# Altium PCB ET2_test Chip.PcbDoc
Units mil, origin at the board's own origin, x right, y up, seen from the top; angles counter-clockwise.
Board outline 4000 x 3600 mil, 4 copper layers (Top Layer, GND, POWER, Bottom Layer), stack 61.6 mil thick; 148 components, 68 nets, 450 pads, 320 vias.
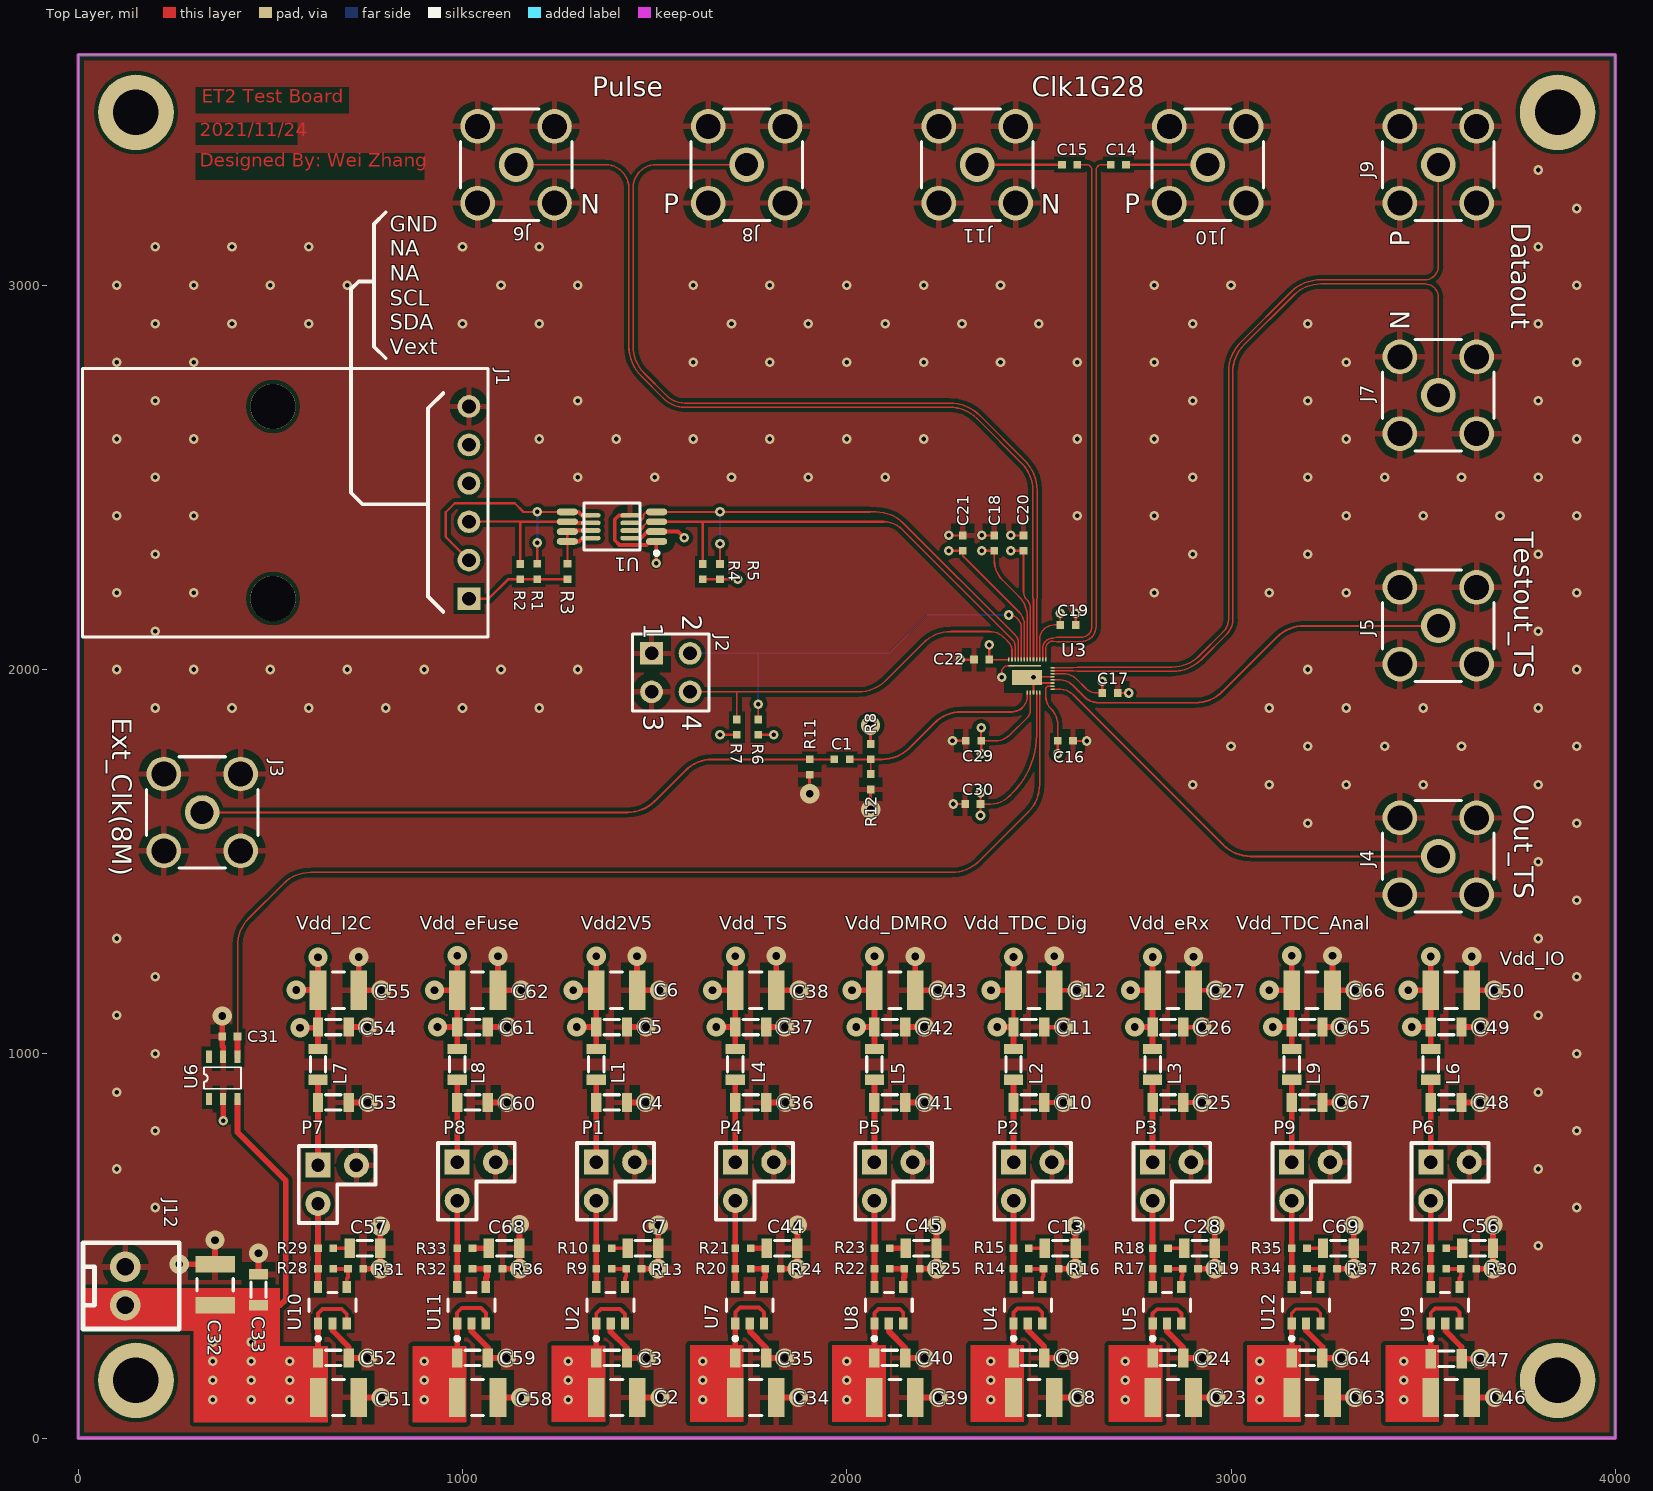
[diagram p0: Top Layer view]
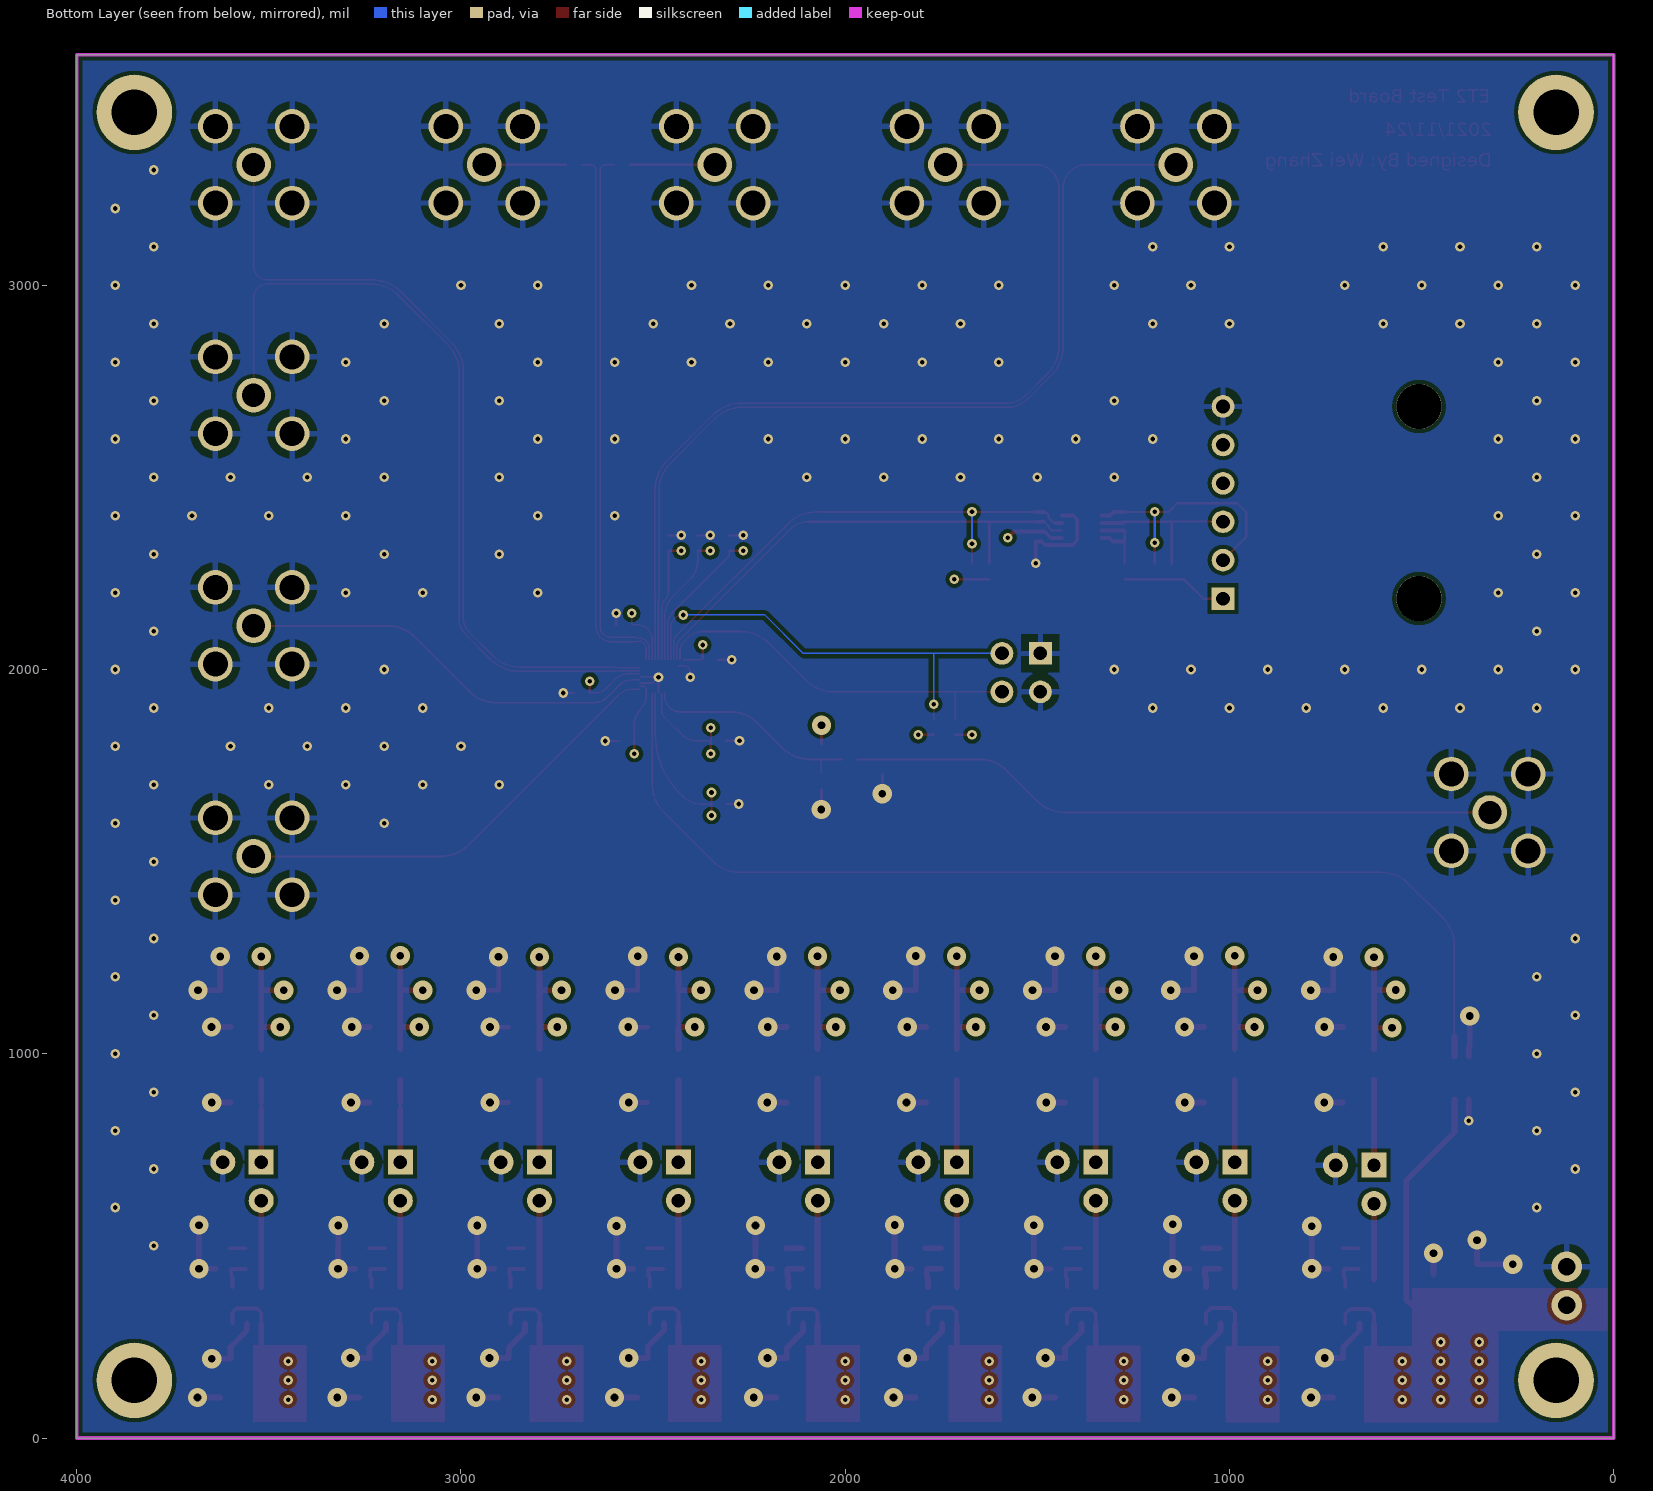
[diagram p1: Bottom Layer view, seen from below]
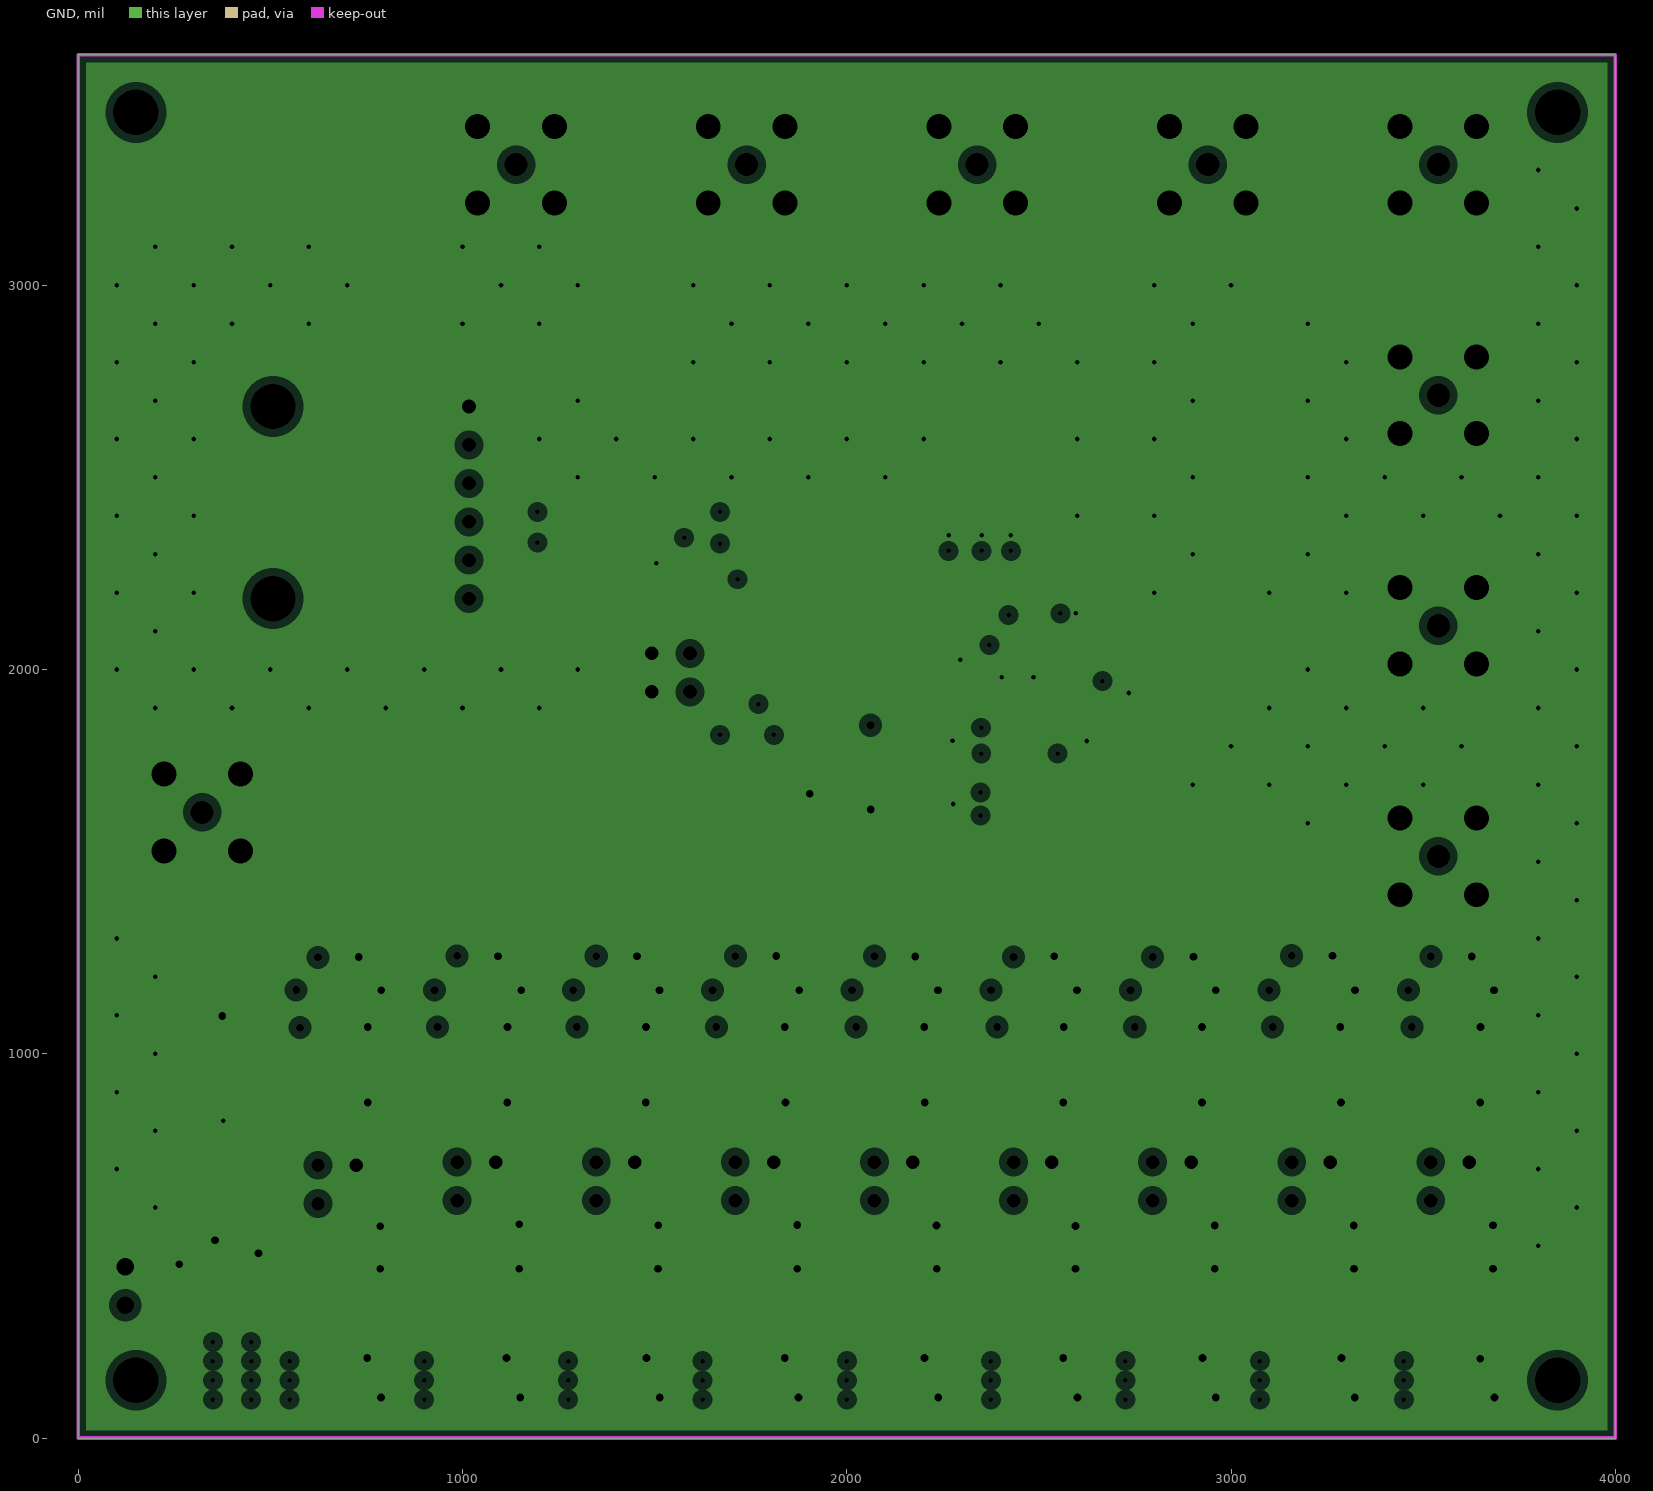
[diagram p2: GND, clearances drawn from the general rule]
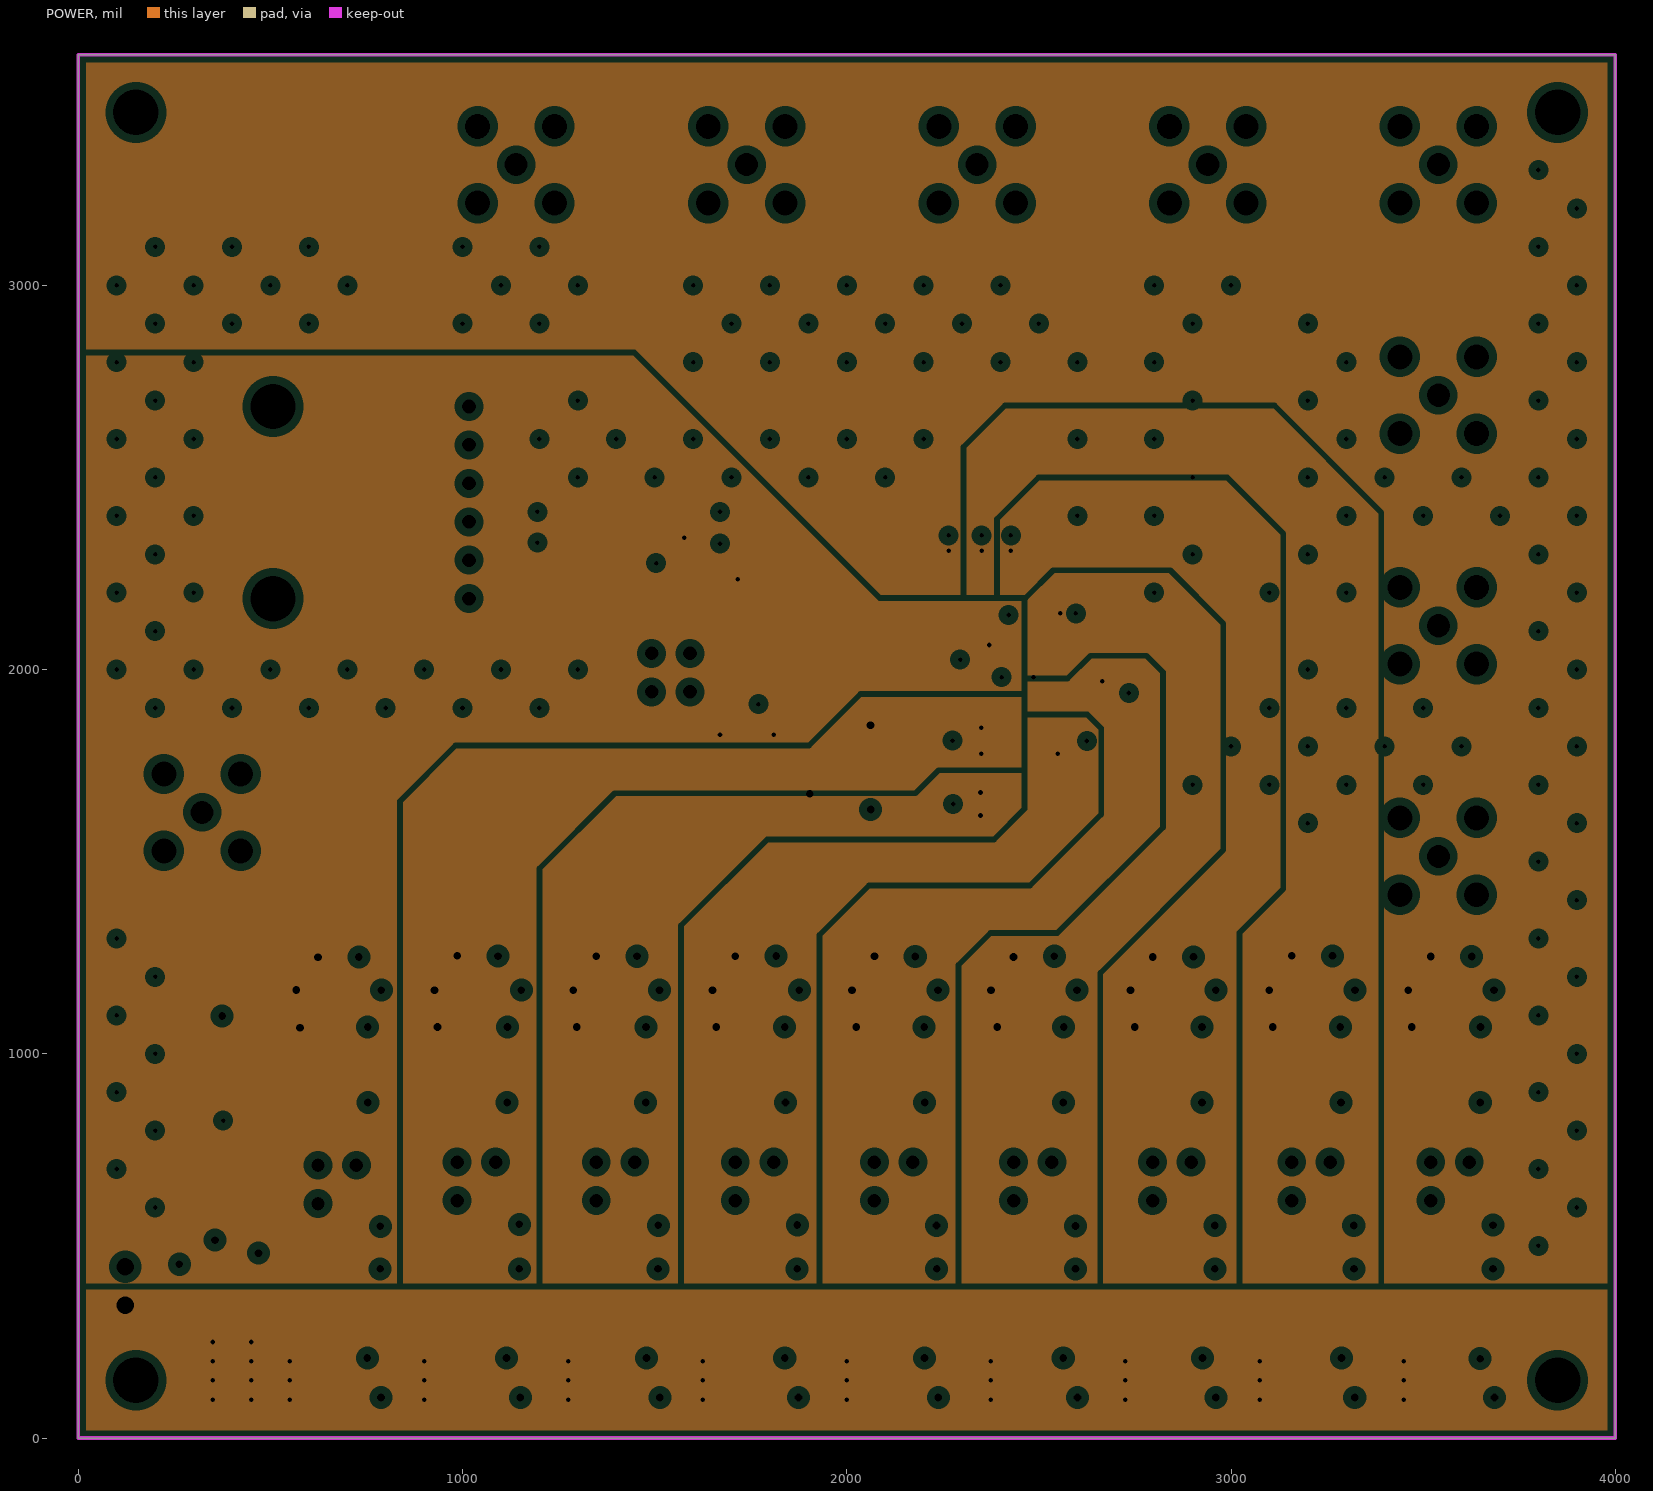
[diagram p3: POWER, clearances drawn from the general rule]

## Layer stack, top to bottom
Top Solder: solder mask 0.7, Solder Resist, Dk 3.5
Top Layer: signal copper 1.4
Dielectric 1: core 3.1, FR-4, Dk 4.2
GND: plane copper 1.3, net (Multiple Nets)
Dielectric 3: prepreg 50, Dk 4.2
POWER: plane copper 1.3, net GND
Dielectric 2: core 3.1, Dk 4.2
Bottom Layer: signal copper 1.4
Bottom Solder: solder mask 0.7, Solder Resist, Dk 3.5

## Board outline
0,0 4000,0 4000,3600 0,3600 0,0

## Design rules (kind name [scope] priority, off if disabled: settings)
Clearance [All] p1: gap=10 except(3: Track-Track Track-SMDPad SMDPad-SMDPad; 4: Arc-Arc Arc-Track Arc-SMDPad Track-THPad Track-Via SMDPad-THPad SMDPad-Via SMDPad-Region THPad-Via Text-Text)
DiffPairsRouting [All] p1: maxlimit=10 minlimit=4 mostfreqgap=7 toplayer_minwidth=4 toplayer_maxwidth=15 toplayer_prefwidth=4 bottomlayer_minwidth=4 bottomlayer_maxwidth=15 bottomlayer_prefwidth=4 maxuncoupledlength=500
PlaneClearance [All] p1: clearance=20
PlaneConnect [InNetClass('All Nets')] p1: planeconnectstyle=Relief reliefexpansion=15 reliefentries=4 reliefconductorwidth=10 reliefairgap=8
PolygonConnect PolygonConnect_1 [IsVia] p1: connectstyle=Direct reliefconductorwidth=10 reliefentries=4 polygonreliefangle="90 Angle" airgapwidth=10
PolygonConnect Via [All] p2: connectstyle=Relief reliefconductorwidth=15 reliefentries=4 polygonreliefangle="90 Angle" airgapwidth=20
RoutingVias [All] p1: holewidth=28 width=50 viastyle="Through Hole" minholewidth=28 minwidth=50 maxholewidth=28 maxwidth=50
SolderMaskExpansion [All] p1: expansion=4
Width [All] p1: maxlimit=30 minlimit=3 preferedwidth=4
27 further rules are at their usual default settings.

## Classes and differential pairs
component class ET2_test_Chip: C1 C2 C3 C4 C5 C6 C7 C8 C9 C10 C11 C12 C13 C14 C15 C16 C17 C18 C19 C20 C21 C22 C23 C24 C25 C26 C27 C28 C29 C30 J1 J2 J3 J4 J5 J6 J7 J8 J9 J10 J11 L1 L2 L3 P1 P2 P3 R1 R2 R3 R4 R5 R6 R7 R8 R9 R10 R11 R12 R13 R14 R15 R16 R17 R18 R19 U1 U2 U3 U4 U5
component class "ET2_test Chip_V1": 30 C31 C32 C33 C34 C35 C36 C37 C38 C39 C40 C41 C42 C43 C44 C45 C46 C47 C48 C49 C50 C51 C52 C53 C54 C55 C56 C57 C58 C59 C60 C61 C62 C63 C64 C65 C66 C67 C68 C69 J12 L4 L5 L6 L7 L8 L9 P4 P5 P6 P7 P8 P9 R20 R21 R22 R23 R24 R25 R26 R27 R28 R29 R30 R31 R32 R33 R34 R35 R36 R37 U6 U7 U8 U9 U10 U11 U12
differential pair CLK1G28_IN: +CLK1G28_IN_P -CLK1G28_IN_N
differential pair DATAOUT: +DATAOUT_P -DATAOUT_N
differential pair PULSE_IN: +PULSE_IN_P -PULSE_IN_N

## Components (designator, comment, footprint, x,y, rotation, side; value= is the part's Value field where it differs from the comment)
C1 "Cap" 0402-EAGLE 1967.6,1766.3 r0 top
C2 "Cap" C1210 1401.2,105.4 r180 top
C3 "Cap" 0805-EAGLE 1428,208.4 r180 top
C4 "Cap" 0805-EAGLE 1428,873.3 r180 top
C5 "Cap" 0805-EAGLE 1428,1069.5 r180 top
C6 "Cap" C1210 1401.1,1165.6 r180 top
C7 "Cap" 0805-EAGLE 1509.51,494 r180 top
C8 "Cap" C1210 2487.2,105.4 r180 top
C9 "Cap" 0805-EAGLE 2514.1,208.4 r180 top
C10 "Cap" 0805-EAGLE 2514,873.3 r180 top
C11 "Cap" 0805-EAGLE 2514,1069.5 r180 top
C12 "Cap" C1210 2487.1,1165.6 r180 top
C13 "Cap" 0805-EAGLE 2595.51,494 r180 top
C14 "Cap" 0402-EAGLE 2726.9,3314 r180 top
C15 "Cap" 0402-EAGLE 2560,3314 r0 top
C16 "Cap" 0402-EAGLE 2589,1814.3 r180 top
C17 "Cap" 0402-EAGLE 2705,1939 r180 top
C18 "Cap" 0402-EAGLE 2384,2349 r270 top
C19 "Cap" 0402-EAGLE 2596,2116 r180 top
C20 "Cap" 0402-EAGLE 2460,2349 r270 top
C21 "Cap" 0402-EAGLE 2302,2349 r270 top
C22 "Cap" 0402-EAGLE 2331,2026 r0 top
C23 "Cap" C1210 2849.1,105.4 r180 top
C24 "Cap" 0805-EAGLE 2875.9,208.4 r180 top
C25 "Cap" 0805-EAGLE 2876,873.3 r180 top
C26 "Cap" 0805-EAGLE 2876,1069.5 r180 top
C27 "Cap" C1210 2849.1,1165.6 r180 top
C28 "Cap" 0805-EAGLE 2958,494 r180 top
C29 "Cap" 0402-EAGLE 2310,1814.3 r0 top
C30 "Cap" 0402-EAGLE 2308,1650 r0 top
C31 "Cap" 0402-EAGLE 374.4,1045 r0 top
C32 "Cap" C1210 356,399 r270 top
C33 "Cap" 0805-EAGLE 469,425.8 r270 top
C34 "Cap" C1210 1763.2,105.4 r180 top
C35 "Cap" 0805-EAGLE 1790,208.4 r180 top
C36 "Cap" 0805-EAGLE 1790,873.3 r180 top
C37 "Cap" 0805-EAGLE 1790,1069.5 r180 top
C38 "Cap" C1210 1763.2,1165.6 r180 top
C39 "Cap" C1210 2125.1,105.4 r180 top
C40 "Cap" 0805-EAGLE 2151.9,208.4 r180 top
C41 "Cap" 0805-EAGLE 2152,873.3 r180 top
C42 "Cap" 0805-EAGLE 2152,1069.5 r180 top
C43 "Cap" C1210 2125.1,1165.6 r180 top
C44 "Cap" 0805-EAGLE 1871.51,494 r180 top
C45 "Cap" 0805-EAGLE 2233.51,494 r180 top
C46 "Cap" C1210 3573.3,105.4 r180 top
C47 "Cap" 0805-EAGLE 3600.2,206.4 r180 top
C48 "Cap" 0805-EAGLE 3600,873.3 r180 top
C49 "Cap" 0805-EAGLE 3600,1069.5 r180 top
C50 "Cap" C1210 3573.2,1165.6 r180 top
C51 "Cap" C1210 677.2,105.4 r180 top
C52 "Cap" 0805-EAGLE 703.9,208.4 r180 top
C53 "Cap" 0805-EAGLE 703.9,873.3 r180 top
C54 "Cap" 0805-EAGLE 703.9,1069.5 r180 top
C55 "Cap" C1210 677,1165.6 r180 top
C56 "Cap" 0805-EAGLE 3682,494 r180 top
C57 "Cap" 0805-EAGLE 786,494 r180 top
C58 "Cap" C1210 1039.1,105.4 r180 top
C59 "Cap" 0805-EAGLE 1066,208.4 r180 top
C60 "Cap" 0805-EAGLE 1066,873.3 r180 top
C61 "Cap" 0805-EAGLE 1066,1069.5 r180 top
C62 "Cap" C1210 1039.2,1165.6 r180 top
C63 "Cap" C1210 3211.1,105.4 r180 top
C64 "Cap" 0805-EAGLE 3237.8,208.4 r180 top
C65 "Cap" 0805-EAGLE 3238,1069.5 r180 top
C66 "Cap" C1210 3211.1,1165.6 r180 top
C67 "Cap" 0805-EAGLE 3238,873.3 r180 top
C68 "Cap" 0805-EAGLE 1148,494 r180 top
C69 "Cap" 0805-EAGLE 3319.51,494 r180 top
J1 "Header 6" USB_ISS 1016.8,2184.6 r90 top
J2 "Header 2X2" HDR2X2 1492,2042 r270 top
J3 "SMA1" SMA_MID 322.5,1628.1 r0 top
J4 "SMA1" SMA_MID 3539.5,1513.9 r0 top
J5 "SMA1" SMA_MID 3539.5,2113.9 r0 top
J6 "SMA1" SMA_MID 1139.5,3313.9 r0 top
J7 "SMA1" SMA_MID 3539.5,2713.9 r0 top
J8 "SMA1" SMA_MID 1739.5,3313.9 r0 top
J9 "SMA1" SMA_MID 3539.5,3313.9 r0 top
J10 "SMA1" SMA_MID 2939.5,3313.9 r0 top
J11 "SMA1" SMA_MID 2339.5,3313.9 r0 top
J12 "Header 2" POWERJ2 122.3,345.7 r180 top
L1 "Inductor" 0805-EAGLE 1348,932.3 r90 top
L2 "Inductor" 0805-EAGLE 2434,932.3 r90 top
L3 "Inductor" 0805-EAGLE 2796,932.3 r90 top
L4 "Inductor" 0805-EAGLE 1710,932.3 r90 top
L5 "Inductor" 0805-EAGLE 2072,932.3 r90 top
L6 "Inductor" 0805-EAGLE 3520,932.3 r90 top
L7 "Inductor" 0805-EAGLE 623.9,932.3 r90 top
L8 "Inductor" 0805-EAGLE 986,932.3 r90 top
L9 "Inductor" 0805-EAGLE 3158,932.3 r90 top
P1 "Header 3" HEADER3_L 1348,718 r270 top
P2 "Header 3" HEADER3_L 2434,718 r270 top
P3 "Header 3" HEADER3_L 2796,718 r270 top
P4 "Header 3" HEADER3_L 1710,718 r270 top
P5 "Header 3" HEADER3_L 2072,718 r270 top
P6 "Header 3" HEADER3_L 3520,718 r270 top
P7 "Header 3" HEADER3_L 623.9,710 r270 top
P8 "Header 3" HEADER3_L 986,718 r270 top
P9 "Header 3" HEADER3_L 3158,718 r270 top
R1 "Res1" 0402-EAGLE 1194.8,2275 r270 top
R2 "Res1" 0402-EAGLE 1150,2274.6 r270 top
R3 "Res1" 0402-EAGLE 1273,2275 r270 top
R4 "Res1" 0402-EAGLE 1625.3,2274.6 r270 top
R5 "Res1" 0402-EAGLE 1670,2274.6 r270 top
R6 "Res1" 0402-EAGLE 1770,1869.9 r270 top
R7 "Res1" 0402-EAGLE 1714,1869.9 r270 top
R8 "Res1" 0402-EAGLE 2062.2,1766.41 r90 top
R9 "1%" 0402-EAGLE 1388,440.28 r180 top
R10 "1%" 0402-EAGLE 1388,494 r180 top
R11 "Res1" 0402-EAGLE 1903.5,1726.4 r90 top
R12 "Res1" 0402-EAGLE 2062.2,1688 r90 top
R13 "1%" 0402-EAGLE 1466.01,440.28 r180 top
R14 "1%" 0402-EAGLE 2474,440.28 r180 top
R15 "1%" 0402-EAGLE 2474,494 r180 top
R16 "1%" 0402-EAGLE 2552.01,440.28 r180 top
R17 "1%" 0402-EAGLE 2836,440.28 r180 top
R18 "1%" 0402-EAGLE 2836,494 r180 top
R19 "1%" 0402-EAGLE 2914.01,440.28 r180 top
R20 "1%" 0402-EAGLE 1750,440.28 r180 top
R21 "1%" 0402-EAGLE 1750,494 r180 top
R22 "1%" 0402-EAGLE 2112,440.28 r180 top
R23 "1%" 0402-EAGLE 2112,494 r180 top
R24 "1%" 0402-EAGLE 1828.01,440.28 r180 top
R25 "1%" 0402-EAGLE 2190.01,440.28 r180 top
R26 "1%" 0402-EAGLE 3560,440.28 r180 top
R27 "1%" 0402-EAGLE 3560,494 r180 top
R28 "1%" 0402-EAGLE 663.9,440.28 r180 top
R29 "1%" 0402-EAGLE 663.9,494 r180 top
R30 "1%" 0402-EAGLE 3638.01,440.28 r180 top
R31 "1%" 0402-EAGLE 741.91,440.28 r180 top
R32 "1%" 0402-EAGLE 1026,440.28 r180 top
R33 "1%" 0402-EAGLE 1026,494 r180 top
R34 "1%" 0402-EAGLE 3198,440.28 r180 top
R35 "1%" 0402-EAGLE 3198,494 r180 top
R36 "1%" 0402-EAGLE 1104.01,440.28 r180 top
R37 "1%" 0402-EAGLE 3276.01,440.28 r180 top
U1 "PCA9306DCUR" PCA9306 1384.9,2371.7 r180 top
U2 "AP7331-WG-7" FP-SOT25-MFG 1385.4,345.4 r90 top
U3 "ET2_test Chip" "ET2_TEST CHIP" 2430,1960 r0 top
U4 "AP7331-WG-7" FP-SOT25-MFG 2471.4,345.4 r90 top
U5 "AP7331-WG-7" FP-SOT25-MFG 2833.4,345.4 r90 top
U6 "ADR130AUJZ" ADR130 377,937 r90 top
U7 "AP7331-WG-7" FP-SOT25-MFG 1747.4,345.4 r90 top
U8 "AP7331-WG-7" FP-SOT25-MFG 2109.4,345.4 r90 top
U9 "AP7331-WG-7" FP-SOT25-MFG 3557.4,345.4 r90 top
U10 "AP7331-WG-7" FP-SOT25-MFG 661.4,345.4 r90 top
U11 "AP7331-WG-7" FP-SOT25-MFG 1023.4,345.4 r90 top
U12 "AP7331-WG-7" FP-SOT25-MFG 3195.4,345.4 r90 top

## Footprints (in the part's own frame and the unit in brackets; to place one, negate y for a bottom-side part, rotate by r counter-clockwise, add the part's x,y. Pads: shape width x height; smd on the part's side, far side on the other; paste and mask are expansions set on the pad)
0402-EAGLE [mil]
  rect 20x20 smd: 1(0,0) 2(40,0)
0805-EAGLE [mil]
  rect 27x50 smd: 1(0,0) 2(80,0)
  silkscreen extent 20,-20 60,20
ADR130 [mm]
  rect 0.8x0.4 smd: 1(-1.4,0.95) 2(-1.4,0) 3(-1.4,-0.95) 4(1.4,-0.95) 5(1.4,0) 6(1.4,0.95)
  silkscreen extent -0.71,-1.17 0.71,1.27
C1210 [mm] "Chip Capacitor, Body 3.2x2.5mm, IPC High Density"
  rect 1.1x2.6 smd: 1(-1.35,0) 2(1.35,0)
  silkscreen extent -0.4,-1.2 0.4,1.2, body extent -1.7,-1.35 1.7,1.35, height 1.3
"ET2_TEST CHIP" [mil]
  rect 2.56x2.56 on Mech13: 0(5.12,36.8) 0(8.66,36.8) 0(12.4,36.8) 0(16.73,36.8) 0(21.06,36.8) 0(25.4,36.8) 0(29.14,36.8) 0(32.68,36.8) 0(36.2,36.8) 0(40.53,36.8) 0(43.76,36.8) 0(46.03,2.57) 0(48.19,36.8) 0(49.13,2.57) 0(51.37,36.8) 0(52.13,2.57) 0(55.71,36.8) 0(59.52,36.8) 0(62.94,2.57) 0(63.07,36.8) 0(66.89,36.77) 0(69.92,2.57) 0(71.22,36.8) 0(76.17,5.18) 0(76.17,9.11) 0(76.17,12.11) 0(76.17,16.05) 0(76.17,19.89) 0(76.17,22.89) 0(76.17,26.07) 0(76.17,30.01)
  rect 78.74x39.37 smd paste-100: 0(39.37,19.68)
  rect 4x10 smd paste-10: 1(40,-20) 2(48,-20) 3(56,-20) 4(64,-20) 5(72,-20) 14(88,66) 15(80,66) 16(72,66) 18(64,66) 19(56,66) 20(48,66) 22(40,66) 25(32,66) 26(24,66) 27(16,66) 28(8,66) 29(0,66) 30(-8,66)
  rect 10x4 smd paste-10: 6(105,-11) 7(105,-3) 8(105,5) 9(105,13) 10(105,21) 11(105,29) 12(105,37) 13(105,45)
  rect 15x4 smd paste-10: 17(68,50) 21(53,50) 23(39,50) 24(24,50)
  rect 25x4 smd paste-10: 31(4,50)
FP-SOT25-MFG [mm]
  rect 0.8x0.55 smd paste+0: 1(-1.2,0.95) 2(-1.2,0) 3(-1.2,-0.95) 4(1.2,-0.95) 5(1.2,0.95)
  silkscreen extent -2.32,-1.55 0.85,1.55, body extent -1.7,-1.65 1.7,1.65, height 0.25
HDR2X2 [mm] "Connector; Header; 2x2 Position"
  rect 1.5x1.5 hole 0.9: 1(0,0)
  round 1.5 hole 0.9: 2(0,2.54) 3(2.54,0) 4(2.54,2.54)
  silkscreen extent -1.27,-1.27 3.81,3.81
HEADER3_L [mil]
  round 65 / inner oval 65x64 / far side round 65 hole 35: 1(100,0) 3(0,100)
  rect 65x65 / inner rect 65x64 / far side rect 65x65 hole 35: 2(0,0)
  silkscreen extent -50,-50 150,150
PCA9306 [mm] "PCA9306DTR2G(TSSOP8)+PCA9306DC(VSSOP8)"
  oval 1.4x0.45 smd: 1(-3.052,0.972) 2(-3.052,0.322) 3(-3.052,-0.328) 4(-3.052,-0.978) 5(2.848,-0.978) 6(2.848,-0.328) 7(2.848,0.322) 8(2.848,0.972)
  oval 1.3x0.3 smd: 1(-1.3,-0.75) 2(-1.3,0.75) 3(-1.3,0.25) 4(-1.3,-0.25) 5(1.3,-0.75) 6(1.3,-0.25) 7(1.3,0.25) 8(1.3,0.75)
  Top Layer lines w0.152: -1.3,0.25 -1.972,0.25 -2.169,0.053 -2.169,-0.033 -2.464,-0.328 -2.56,-0.328 -3.052,-0.328 ; -1.3,-0.25 -1.741,-0.25 -1.844,-0.25 -2.192,-0.598 -2.192,-0.785 -2.385,-0.978 -3.052,-0.978
  Top Layer lines w0.254: 2.848,-0.328 2.771,-0.25 1.3,-0.25 ; 2.848,-0.978 2.103,-0.978 1.875,-0.75 1.3,-0.75 ; 2.817,0.998 2.791,0.972 2.07,0.972 1.847,0.75 1.3,0.75 ; 1.3,0.25 2.776,0.25 2.848,0.322 ; -1.3,0.75 -2.034,0.75 -2.461,0.322 -3.052,0.322 ; -1.3,-0.25 -1.741,-0.25 ; -1.3,-0.75 -0.554,-0.75 -0.287,-0.483 -0.287,0.897 -0.605,1.214 -2.398,1.214 -2.639,0.972 -3.052,0.972 ; -2.469,-0.978 -3.052,-0.978 ; -2.56,-0.328 -3.052,-0.328 ; 2.848,0.322 2.848,0.322
  silkscreen extent -3.18,-1.55 1.75,1.87
POWERJ2 [mil]
  round 80 hole 45: 1(0,0) 2(0,-100)
  silkscreen extent -140,-162 110,62
SMA_MID [mil]
  round 90 hole 60: 1(0,0)
  round 90 hole 65: 2(-100,100) 3(-100,-100) 4(100,-100) 5(100,100)
  silkscreen extent -145,-145 145,145
USB_ISS [mm] "USB-ISS modul for I2C, SPI, serial port"
  rect 1.5x1.5 hole 0.9: 1(0,0)
  round 1.5 hole 0.9: 2(2.54,0) 3(5.08,0) 4(7.62,0) 5(10.16,0) 6(12.7,0)
  round 3 hole 3 unplated: ""(0,12.954) ""(12.7,12.954)
  silkscreen extent -2.54,-1.27 15.21,25.54

## Part data
C1 C2 C3 C4 C5 C6 C7 C8 C9 C10 C11 C12 C13 C14 C15 C16 C17 C18 C19 C20 C21 C22 C23 C24 C25 C26 C27 C28 C29 C30 C31 C32 C33 C34 C35 C36 C37 C38 C39 C40 C41 C42 C43 C44 C45 C46 C47 C48 C49 C50 C51 C52 C53 C54 C55 C56 C57 C58 C59 C60 C61 C62 C63 C64 C65 C66 C67 C68 C69: "Capacitor"
J1: "Header, 6-Pin"
J2: "Header, 2-Pin, Dual row"
J12: "Header, 2-Pin"
P1 P2 P3 P4 P5 P6 P7 P8 P9: "Header, 3-Pin"
R1 R2 R3 R4 R5 R6 R7 R8 R11 R12: "Resistor"
R9 R10 R13 R14 R15 R16 R17 R18 R19 R20 R21 R22 R23 R24 R25 R26 R27 R28 R29 R30 R31 R32 R33 R34 R35 R36 R37: library part Res1, "Resistor"
U1: library part PCA9306
U2 U4 U5 U7 U8 U9 U10 U11 U12: library part CMP-12756-000022-1, "IC REG LIN POS ADJ 300MA SOT25"
U6: library part ADR130

## Free pads (board coordinates)
  round 196.85 hole 118.11: 0(150,150) 0(150,3450) 0(3850,150) 0(3850,3450)

## Via types
v1: diameter 25, hole 12, Top Layer to Bottom Layer, tented both sides, 214 vias
v2: diameter 50, hole 20, Top Layer to Bottom Layer, tented both sides, 106 vias

## Nets (pads, with @x,y where several pads share a name; then routed paths per layer and width w, separated by ;. In a path a pad name is that pad's centre, name@x,y a point inside that pad or via, vN(x,y) a via of type N, cw(c..) or ccw(c..) an arc to the next point about the centre after c; other vN are vias at no path point)
CLK1G28_IN_N: C15.2 U3.15 | length 1422.4
  Top Layer w4: U3.15 2510,2055 cw(c2537,2055) 2537,2082 2546.6,2083.5 2609.1,2083.5 ccw(c2609.1,2112.3) 2637.9,2112.3 2637.9,3299.9 ccw(c2623.8,3299.9) 2623.8,3314 C15.2
CLK1G28_IN_P: C14.2 U3.14 | length 1427.2
  Top Layer w4: U3.14 2518,2055 cw(c2537,2055) 2537,2074 2546.6,2072.5 2609.1,2072.5 ccw(c2609.1,2112.3) 2648.9,2112.3 2648.9,3299.9 cw(c2663,3299.9) 2663,3314 C14.2
DATAOUT_N: J7.1 U3.12 | length 2096
  Top Layer w4: U3.12 2589.5,1997 2599.7,1995.4 2847.44,1995.4 ccw(c2847.44,2103.36) 2923.78,2027.02 2988.01,2091.26 ccw(c2947.97,2131.3) 3004.6,2131.3 3004.6,2774.28 cw(c3104.6,2774.28) 3033.89,2844.99 3163.15,2974.25 cw(c3233.86,2903.54) 3233.86,3003.54 3504.9,3003.54 cw(c3504.9,2968.94) 3539.5,2968.94 J7.1
DATAOUT_P: J9.1 U3.13 | length 2105.7
  Top Layer w4: U3.13 2589.5,2005 2599.7,2006.4 2847.44,2006.4 ccw(c2847.44,2103.36) 2916,2034.8 2980.24,2099.04 ccw(c2947.97,2131.3) 2993.6,2131.3 2993.6,2774.28 cw(c3104.6,2774.28) 3026.11,2852.77 3155.37,2982.03 cw(c3233.86,2903.54) 3233.86,3014.54 3504.9,3014.54 ccw(c3504.9,3049.14) 3539.5,3049.14 J9.1
GND: C2.1 C3.1 C4.1 C5.1 C6.1 C7.1 C8.1 C9.1 C10.1 C11.1 C12.1 C13.1 C16.1 C17.1 C18.1 C19.1 C20.1 C21.1 C22.1 C23.1 C24.1 C25.1 C26.1 C27.1 C28.1 C29.1 C30.1 C31.1 C32.1 C33.1 C34.1 C35.1 C36.1 C37.1 C38.1 C39.1 C40.1 C41.1 C42.1 C43.1 C44.1 C45.1 C46.1 C47.1 C48.1 C49.1 C50.1 C51.1 C52.1 C53.1 C54.1 C55.1 C56.1 C57.1 C58.1 C59.1 C60.1 C61.1 C62.1 C63.1 C64.1 C65.1 C66.1 C67.1 C68.1 C69.1 J1.6 J2.1 J2.3 J3.2 J3.3 J3.4 J3.5 J4.2 J4.3 J4.4 J4.5 J5.2 J5.3 J5.4 J5.5 J6.2 J6.3 J6.4 J6.5 J7.2 J7.3 J7.4 J7.5 J8.2 J8.3 J8.4 J8.5 J9.2 J9.3 J9.4 J9.5 J10.2 J10.3 J10.4 J10.5 J11.2 J11.3 J11.4 J11.5 J12.2 P1.3 P2.3 P3.3 P4.3 P5.3 P6.3 P7.3 P8.3 P9.3 R11.1 R12.1 R13.1 R16.1 R19.1 R24.1 R25.1 R30.1 R31.1 R36.1 R37.1 U1.1 U2.2 U3.0@2469.37,1979.68 U3.3 U3.8 U3.10 U3.17 U3.21 U3.23 U3.24 U3.31 U4.2 U5.2 U6.2 U6.5 U7.2 U8.2 U9.2 U10.2 U11.2 U12.2 | length 6666.7
  Top Layer w4: v1(2403,1980) 2403,1994 cw(c2417.49,1994) 2407.23,2004.23 2408,2005 ; 2407.69,2004.7 cw(c2420.52,1991.82) 2420.52,2010 U3.31 ; U3.3 v1(2486,1980) ; U3.8 2501,1965 v1(2486,1980) ; U3.10 2487,1981 v1(2486,1980) ; C16.1 C16.1@2589.3,1814
  Top Layer w6: v1(2265,2349) C21.1 ; v1(2275.3,1814.8) C29.1@2309.5,1814.8 ; v1(2277,1650) C30.1 ; v1(2295,2025.5) 2330.5,2025.5 C22.1 ; v1(2351,2349) C18.1 ; v1(2427,2349) C20.1 ; C16.1@2589.3,1814 v1(2625,1814) ; C19.1 v1(2596,2146) ; C17.1 v1@2741,1939
  Top Layer w8: v2@1903,1676.3 v2(1903.5,1676.8) R11.1 ; v2(2062.2,1635.8) R12.1
  Top Layer w10: v1(1504,2277) 1504,2332.37 U1.1@1505.04,2333.41
  Top Layer w12: C10.1 v2(2563.7,873.3) v2@2564,873 ; C11.1 v2(2564.5,1069.5) v2@2566,1068 ; v2(2540.25,1253.75) C12.1 v2(2599.4,1165.6) ; C25.1 v2(2924.7,873.3) v2@2925,873 ; C26.1 v2(2924.5,1069.5) v2@2925,1070 ; v2@2905,1255 v2(2902.25,1252.25) C27.1 v2(2960.4,1165.6) v2@2961,1165
  Top Layer w15: v2(262.85,452.15) C32.1 v2(356,515) ; v2(374.4,1098.4) C31.1 374.4,1024.28 ccw(c383.28,1024.28) 377,1018 U6.5 ; v1(377,826) U6.2 ; C33.1 v2(469,481) ; U10.2 661.4,279.6 703.9,237.1 C52.1 v2(752.4,208.4) v2@753,209 ; C53.1 v2(753.7,873.3) v2@755,872 ; C54.1 v2(753,1069.5) ; v2(730,1252) 730,1165.75 C55.1 v2(788.6,1165.6) ; C51.1 v2(787.6,105.4) v2@788,105 ; R31.1 v2(785.72,440.28) 786,440.55 C57.1 v2(786,551) v2@786,557 ; U11.2 1023.4,277.6 1066,235 C59.1 v2(1114.4,208.4) v2@1115,209 ; C60.1 v2(1116,873.3) v2@1116,873 ; C61.1 v2(1117,1069.5) v2@1117,1072 ; v2@1089,1254 v2(1092.35,1254) C62.1 v2(1153,1165.6) ; C58.1 v2(1150.6,105.4) v2@1151,105 ; R36.1 v2(1148,440.28) C68.1 v2(1148,556) v2@1149,556 ; U2.2 1385.4,276.6 1428,234 C3.1 v2(1478.6,208.4) v2@1479,208 ; C4.1 v2(1476.7,873.3) ; C5.1 v2(1477.5,1069.5) ; v2@1454,1254 v2(1454.25,1253.75) C6.1 v2(1512.4,1165.6) ; C2.1 v2(1513.6,105.4) v2@1515,104 ; R13.1 v2(1508.72,440.28) ; v2@1509.51,441.06 C7.1 v2(1509.51,553.49) ; U7.2 1747.4,277.6 1790,235 C35.1 v2(1838.6,208.4) ; C36.1 v2(1840.7,873.3) ; C37.1 v2(1838.5,1069.5) ; C34.1 v2(1874.6,105.4) ; v2@1818,1256 v2(1816.35,1254.35) C38.1 v2(1876.4,1165.6) ; R24.1 v2(1870.72,440.28) 1871.51,441.06 C44.1 v2(1871.51,554.51) v2@1872,555 ; U8.2 2109.4,277.6 2151.9,235.1 C40.1 v2(2202.4,208.4) ; C41.1 v2(2202.7,873.3) v2@2203,873 ; C42.1 v2(2201.5,1069.5) v2@2202,1069 ; C39.1 v2(2238.4,105.4) ; v2@2180,1255 v2(2178.25,1253.25) C43.1 v2(2237.4,1165.6) v2@2238,1165 ; R25.1 v2(2234,440.28) 2234,494 C45.1 v2(2233.51,553) ; U4.2 2471.4,280.6 2514.1,237.9 C9.1 v2(2563.4,208.4) v2@2564,209 ; C8.1 v2(2600.6,105.4) v2@2601,105 ; R16.1 v2(2595.51,440.28) C13.1 v2(2595.51,552) ; U5.2 2833.4,277.6 2875.9,235.1 C24.1 v2(2925.6,208.4) v2@2929,205 ; C23.1 v2(2960.6,105.4) v2@2961,105 ; R19.1 v2(2958,440.28) C28.1 v2(2958,553) v2@2960,553 ; U12.2 3195.4,279.6 3237.8,237.2 C64.1 v2(3287.6,208.4) v2@3288,208 ; C67.1 v2(3286.3,873.3) v2@3287,874 ; C65.1 v2(3284.5,1069.5) v2@3286,1068 ; v2@3264,1255 v2(3264.25,1254.75) C66.1 v2(3322.6,1165.6) v2@3323,1166 ; C63.1 v2(3322,105.4) ; R37.1 v2(3320,440.28) 3320,494 C69.1 v2(3319.51,553) v2@3322,553 ; U9.2 3557.4,279.6 3600.2,236.8 C47.1 v2(3648.6,206.4) ; C48.1 v2(3648.7,873.3) v2@3650,872 ; C49.1 v2(3649.5,1069.5) v2@3652,1072 ; C46.1 v2(3685.6,105.4) v2@3687,104 ; v2@3629,1256 v2(3626.35,1253.35) C50.1 v2(3684.6,1165.6) ; R30.1 v2(3682,440.28) C56.1 v2(3682,554) v2@3685,554
  other v1: 3800,500 200,600 3900,600 100,700 3800,700 200,800 3900,800 100,900 3800,900 200,1000 3900,1000 100,1100 3800,1100 200,1200 3900,1200 100,1300 3800,1300 3900,1400 3800,1500 3200,1600 3900,1600 2900,1700 3100,1700 3300,1700 3500,1700 3800,1700 3000,1800 3200,1800 3400,1800 3600,1800 3900,1800 200,1900 400,1900 600,1900 800,1900 1000,1900 1200,1900 3100,1900 3300,1900 3500,1900 3800,1900 2734,1939 100,2000 300,2000 500,2000 700,2000 900,2000 1100,2000 1300,2000 3200,2000 3900,2000 200,2100 3800,2100 100,2200 300,2200 2800,2200 3100,2200 3300,2200 3900,2200 200,2300 2900,2300 3200,2300 3800,2300 100,2400 300,2400 2600,2400 2800,2400 3300,2400 3500,2400 3700,2400 3900,2400 200,2500 1300,2500 1500,2500 1700,2500 1900,2500 2100,2500 2900,2500 3200,2500 3400,2500 3600,2500 3800,2500 100,2600 300,2600 1200,2600 1400,2600 1600,2600 1800,2600 2000,2600 2200,2600 2600,2600 2800,2600 3300,2600 3900,2600 200,2700 1300,2700 2900,2700 3200,2700 3800,2700 100,2800 300,2800 1600,2800 1800,2800 2000,2800 2200,2800 2400,2800 2600,2800 2800,2800 3300,2800 3900,2800 200,2900 400,2900 600,2900 1000,2900 1200,2900 1700,2900 1900,2900 2100,2900 2300,2900 2500,2900 2900,2900 3200,2900 3800,2900 100,3000 300,3000 500,3000 700,3000 1100,3000 1300,3000 1600,3000 1800,3000 2000,3000 2200,3000 2400,3000 2800,3000 3000,3000 3900,3000 200,3100 400,3100 600,3100 1000,3100 1200,3100 3800,3100 3900,3200 3800,3300
I2C_A0: J2.4 R7.1 U3.29 | length 1014.6
  Top Layer w4: J2.4 1714,1942 ; R7.1 1714,1942 ; U3.29 2430,2051 ccw(c2403.44,2051) 2422.22,2069.78 2407.61,2084.39 ccw(c2372.34,2049.12) 2372.34,2099 2270.42,2099 ccw(c2270.42,1999) 2199.71,2069.71 2101.29,1971.29 cw(c2030.58,2042) 2030.58,1942 1714,1942
I2C_RSTN: J2.2 R6.1 U3.26 | length 1177.5
  Top Layer w4: R6.1 v1(1770,1910.1) ; v1(2421.22,2142) cw(c2421.22,2109.22) 2454,2109.22 U3.26
  Bottom Layer w4: J2.2 1770,2042 ; v1(1770,1910.1) 1770,2042 ; v1(2421.22,2142) 2209,2142 2109,2042 1770,2042
I2C_SCL: R4.1 U1.3 U3.28 | length 1214.9
  Top Layer w4: 2096,2384.6 cw(c2096,2316.02) 2144.49,2364.51 2432.24,2076.76 ; 2431.5,2077.46 2432.23,2076.74 ; U3.28 2438,2061.81 ccw(c2415.81,2061.81) 2432.23,2076.74
  Top Layer w6: U1.3@1505.04,2384.6 2096,2384.6 ; R4.1 1625.3,2384.5
I2C_SDA: R5.1 U1.4 U3.27 | length 1263.2
  Top Layer w4: 2060,2410.19 2076.39,2410.19 cw(c2076.39,2310.19) 2147.1,2380.9 2439,2089 cw(c2422.1,2072.1) 2446,2072.1 U3.27
  Top Layer w6: U1.4@1505.04,2410.19 2060,2410.19 ; R5.1 v1(1670,2327.4)
  Bottom Layer w6: v1(1670,2327.4) v1(1670,2410.2)
NetC1_1: C1.1 J3.1 R11.2 | length 1693.8
  Top Layer w5: J3.1 1429.28,1628.1 ccw(c1429.28,1728.1) 1499.99,1657.39 1579.71,1737.11 cw(c1650.42,1666.4) 1650.42,1766.4 R11.2 C1.1
NetC1_2: C1.2 R8.1 R12.2 U3.1 | length 575.8
  Top Layer w4: C1.2 C1.2@2007.71,1766.41 ; R12.2 R8.1 ; 2456.97,1900.97 ccw(c2425.41,1932.47) 2470,1932.47 U3.1
  Top Layer w5: C1.2@2007.71,1766.41 R8.1 2091.99,1766.41 ccw(c2091.99,1866.41) 2162.7,1795.7 2227.71,1860.71 cw(c2298.42,1790) 2298.42,1890 2430.44,1890 ccw(c2430.44,1927.56) 2456.97,1900.97
NetC4_2: C4.2 L1.1 P1.2 | length 234.3
  Top Layer w15: P1.2@1348,698 P1.2 C4.2 L1.1
NetC7_2: C7.2 R10.1 | length 41.5
  Top Layer w10: R10.1 C7.2
NetC10_2: C10.2 L2.1 P2.2 | length 214.3
  Top Layer w15: P2.2 C10.2 L2.1
NetC13_2: C13.2 R15.1 | length 41.5
  Top Layer w10: R15.1 C13.2
NetC14_1: C14.1 J10.1 | length 212.6
  Top Layer w6: C14.1 J10.1@2939.4,3314
  Top Layer w10: J10.1@2939.4,3314 J10.1
NetC15_1: C15.1 J11.1 | length 220.4
  Top Layer w6: J11.1 C15.1@2559.9,3313.9
NetC25_2: C25.2 L3.1 P3.2 | length 214.3
  Top Layer w15: P3.2 C25.2 L3.1
NetC28_2: C28.2 R18.1 | length 42
  Top Layer w10: R18.1 C28.2
NetC36_2: C36.2 L4.1 P4.2 | length 214.3
  Top Layer w15: P4.2 L4.1
NetC41_2: C41.2 L5.1 P5.2 | length 277
  Top Layer w10: C41.2 L5.1
  Top Layer w15: P5.2 L5.1@2072,936
NetC44_2: C44.2 R21.1 | length 41.5
  Top Layer w15: R21.1 C44.2
NetC45_2: C45.2 R23.1 | length 41.5
  Top Layer w15: R23.1 C45.2
NetC48_2: C48.2 L6.1 P6.2 | length 198.3
  Top Layer w15: P6.2 C48.2@3520,857.3 ; C48.2 L6.1
NetC53_2: C53.2 L7.1 P7.2 | length 222.3
  Top Layer w15: P7.2 L7.1
NetC56_2: C56.2 R27.1 | length 42
  Top Layer w10: R27.1 C56.2
NetC57_2: C57.2 R29.1 | length 42.1
  Top Layer w10: R29.1 C57.2
NetC60_2: C60.2 L8.1 P8.2 | length 214.3
  Top Layer w15: P8.2 L8.1
NetC67_2: C67.2 L9.1 P9.2 | length 198.3
  Top Layer w15: P9.2 C67.2@3158,857.3 ; C67.2 L9.1
NetC68_2: C68.2 R33.1 | length 42
  Top Layer w15: R33.1 C68.2
NetC69_2: C69.2 R35.1 | length 41.5
  Top Layer w10: R35.1 C69.2
NetJ1_2: J1.2 R1.1 U1.5 | length 620.4
  Top Layer w6: J1.2 956.2,2345.2 956.2,2409.1 979.7,2432.6 1135.9,2432.6 1158.31,2410.19 U1.5@1272.76,2410.19 ; R1.1 v1(1194.8,2330)
  Bottom Layer w6: v1(1194.8,2330) v1(1194.8,2410.2)
  other v1: 1194.8,2410.2
NetJ1_3: J1.3 R2.1 U1.6 | length 621.2
  Top Layer w4: J1.3 1150,2384.6
  Top Layer w6: J1.3 1017.41,2385.21 1272.14,2385.21 1271.53,2384.6 1150,2384.6 R2.1
NetP1_1: P1.1 R9.2 R10.2 U2.5 | length 225.4
  Top Layer w15: U2.5 R9.2 R10.2 P1.1
NetP2_1: P2.1 R14.2 R15.2 U4.5 | length 225.4
  Top Layer w15: U4.5 P2.1
NetP3_1: P3.1 R17.2 R18.2 U5.5 | length 279.1
  Top Layer w10: R17.2 R18.2
  Top Layer w15: U5.5 P3.1
NetP4_1: P4.1 R20.2 R21.2 U7.5 | length 225.4
  Top Layer w15: U7.5 P4.1
NetP5_1: P5.1 R22.2 R23.2 U8.5 | length 225.4
  Top Layer w15: U8.5 R22.2 ; R22.2 R23.2 P5.1
NetP6_1: P6.1 R26.2 R27.2 U9.5 | length 225.4
  Top Layer w15: U9.5 P6.1
NetP7_1: P7.1 R28.2 R29.2 U10.5 | length 217.2
  Top Layer w10: P7.1@623.9,609.9 P7.1@624,590
  Top Layer w15: 623.9,412.64 P7.1@623.9,609.9
NetP8_1: P8.1 R32.2 R33.2 U11.5 | length 279.1
  Top Layer w10: R32.2 R33.2
  Top Layer w15: U11.5 P8.1
NetP9_1: P9.1 R34.2 R35.2 U12.5 | length 225.4
  Top Layer w15: U12.5 P9.1
NetR3_1: R3.1 U1.7 U1.8 | length 82.8
  Top Layer w6: U1.8@1272.76,2333.41 U1.7@1272.76,2359 ; R3.1 U1.8@1273,2332.17
NetR9_1: R9.1 R13.2 U2.4 | length 86.5
  Top Layer w10: R9.1 R13.2 1426.01,423.27 cw(c1415.73,423.27) 1423,416 1422.8,415.8 U2.4
NetR14_1: R14.1 R16.2 U4.4 | length 86.5
  Top Layer w10: R14.1 R16.2 2512.01,423.85 cw(c2505.15,423.85) 2510,419 ccw(c2512.89,416.11) 2508.8,416.11 U4.4
NetR17_1: R17.1 R19.2 U5.4 | length 86.5
  Top Layer w10: R17.1 R19.2 2874.01,426.27 cw(c2863.73,426.27) 2871,419 2870.8,418.8 U5.4
NetR20_1: R20.1 R24.2 U7.4 | length 86.5
  Top Layer w15: R20.1 R24.2 1788.01,421.85 cw(c1781.15,421.85) 1786,417 ccw(c1788.89,414.11) 1784.8,414.11 U7.4
NetR22_1: R22.1 R25.2 U8.4 | length 86.5
  Top Layer w15: R22.1 R25.2 2150.01,421.85 cw(c2143.15,421.85) 2148,417 2148,395.54 cw(c2143.91,395.54) U8.4
NetR26_1: R26.1 R30.2 U9.4 | length 86.5
  Top Layer w10: R26.1 R30.2 3598.01,422.85 cw(c3591.15,422.85) 3596,418 ccw(c3598.89,415.11) 3594.8,415.11 U9.4
NetR28_1: R28.1 R31.2 U10.4 | length 87.4
  Top Layer w10: R28.1 R31.2 701.91,418.71 cw(c698.8,418.71) 698.8,415.6 U10.4
NetR32_1: R32.1 R36.2 U11.4 | length 86.5
  Top Layer w15: R32.1 R36.2 1064.01,422.85 cw(c1057.15,422.85) 1062,418 ccw(c1064.89,415.11) 1060.8,415.11 U11.4
NetR34_1: R34.1 R37.2 U12.4 | length 86.5
  Top Layer w10: R34.1 R37.2 3236.01,420.85 cw(c3229.15,420.85) 3234,416 ccw(c3236.89,413.11) 3232.8,413.11 U12.4
OUT_TS: J4.1 U3.6 | length 1178.2
  Top Layer w4: U3.6 2553.35,1949 cw(c2553.35,1897.45) 2557.14,1948.86 cw(c2553.35,1897.45) 2589.8,1933.9
  Top Layer w5: 2589.8,1933.9 2980.51,1543.19 ccw(c3051.22,1613.9) 3051.22,1513.9 J4.1
PULSE_IN_N: J6.1 U3.19 | length 2421.1
  Top Layer w4: J6.1 1371.94,3313.9 cw(c1371.94,3253.12) 1432.72,3253.12 1432.72,2842.1 ccw(c1543.72,2842.1) 1465.23,2763.61 1523.32,2705.52 ccw(c1578.66,2760.86) 1578.66,2682.6 2267.98,2682.6 cw(c2267.98,2582.6) 2338.69,2653.31 2455.01,2536.99 cw(c2384.3,2466.28) 2484.3,2466.28 2484.3,2188.9 2486,2181 U3.19
PULSE_IN_P: J8.1 U3.18 | length 2423.6
  Top Layer w4: J8.1 1504.5,3313.9 ccw(c1504.5,3253.12) 1443.72,3253.12 1443.72,2842.1 ccw(c1543.72,2842.1) 1473.01,2771.39 1531.1,2713.3 ccw(c1578.66,2760.86) 1578.66,2693.6 2267.98,2693.6 cw(c2267.98,2582.6) 2346.47,2661.09 2462.79,2544.77 cw(c2384.3,2466.28) 2495.3,2466.28 2495.3,2188.9 2494,2180.6 U3.18
TESTOUT_TS: J5.1 U3.9 | length 1099.4
  Top Layer w4: U3.9 2555.62,1973 cw(c2555.62,1928.62) 2587,1960 ; J5.1@3539.1,2113.5 J5.1
  Top Layer w5: 2587,1960 2618.3,1928.7 ccw(c2655,1965.41) 2655,1913.5 2907.08,1913.5 ccw(c2907.08,2013.5) 2977.79,1942.79 3119.21,2084.21 cw(c3189.92,2013.5) 3189.92,2113.5 J5.1@3539.1,2113.5
VDD2V5: C5.2 C6.2 C30.2 L1.2 U3.4 | length 781.9
  Top Layer w4: v1(2348,1620) C30.2 ; v1(2348,1680) C30.2 ; U3.4 2494,1830.7 cw(c2278.4,1830.7) 2431,1678.39 2422.82,1670.22 cw(c2374,1719.05) 2374,1650 C30.2
  Top Layer w15: v2(1288.4,1165.6) C6.2 v2(1347.95,1253.95) ; v2(1297.5,1069.5) C5.2 ; L1.2 C5.2 ; C6.2@1348,1165.55 C5.2
VDD_5V: C2.2 C3.2 C8.2 C9.2 C23.2 C24.2 C32.2 C33.2 C34.2 C35.2 C39.2 C40.2 C46.2 C47.2 C51.2 C52.2 C58.2 C59.2 C63.2 C64.2 J12.1 U2.1 U2.3 U4.1 U4.3 U5.1 U5.3 U6.3 U7.1 U7.3 U8.1 U8.3 U9.1 U9.3 U10.1 U10.3 U11.1 U11.3 U12.1 U12.3 | length 3723.3
  Top Layer w8: U12.1 3158,325 3169,336 3222,336 3232.8,325.2 U12.3
  Top Layer w10: U10.1 624,324.1 635.8,335.9 685.5,335.9 698.8,322.6 U10.3 ; C51.2 U10.1@624.05,298.16 ; U11.1 986,326 998,338 1048,338 1060.8,325.2 U11.3 ; U2.1@1348.05,298.1 U2.1 1348,324 1360,336 1410,336 1422.8,323.2 U2.3 ; U7.1 1710,327.68 1722.32,340 1772,340 1784.8,327.2 U7.3 ; U8.1 2072,325 2083,336 2138,336 2146.8,327.2 U8.3 ; U4.1 2434,327 2444,337 2498,337 2508.8,326.2 U4.3 ; U5.1 2796,324 2807,335 2860,335 2870.8,324.2 U5.3 ; U9.1 3520,326 3531,337 3585,337 3594.8,327.2 U9.3
  Top Layer w15: U6.3 414.4,795.6 540,670 540,360 525.8,345.8 C33.2 ; C52.2 U10.1@623.9,298.06 ; C58.2 U11.1@985.95,298.11 ; C2.2 U2.1@1348.05,298.1 ; C35.2 U7.1 ; C34.2 C35.2@1710.05,208.35 ; C39.2 U8.1@2071.95,298.11 ; C8.2 U4.1@2434.05,298.1 ; C23.2 U5.1@2795.95,298.11 ; C63.2 U12.1@3157.95,298.11 ; U9.1 3520.15,298 C46.2
  other v1: 350,100 450,100 550,100 900,100 1275,100 1625,100 2000,100 2375,100 2725,100 3075,100 3450,100 350,150 450,150 550,150 900,150 1275,150 1625,150 2000,150 2375,150 2725,150 3075,150 3450,150 350,200 450,200 550,200 900,200 1275,200 1625,200 2000,200 2375,200 2725,200 3075,200 3450,200 350,250 450,250
VDD_DMRO: C17.2 C42.2 C43.2 L5.2 U3.11 | length 526.8
  Top Layer w4: U3.11 2563,1989 cw(c2563,1938.3) 2598.83,1974.17 2621.98,1951.02 ccw(c2651,1980.04) 2651,1939 C17.2
  Top Layer w6: C17.2 v1(2665,1970)
  Top Layer w15: v2@2013,1166 v2(2013.45,1165.55) 2072,1165.55 C42.2 ; v2@2024,1070 v2(2024.5,1069.5) C42.2 ; C43.2 v2(2071.95,1253.95) v2(2071.95,1253.95) ; L5.2 C42.2
VDD_EFUSE: C29.2 C61.2 C62.2 L8.2 R8.2 U3.2 | length 685
  Top Layer w4: C29.2@2349.6,1814.7 2387,1814.7 ccw(c2387,1869.5) 2425.75,1830.75 2470.3,1875.3 ccw(c2451.71,1893.89) 2478,1893.89 U3.2
  Top Layer w6: C29.2@2349.6,1814.7 v1(2349.6,1848.5) ; v1(2350,1781.2) C29.2
  Top Layer w8: v2@2062,1851 v2(2062,1855) 2062,1806.61 R8.2
  Top Layer w10: C62.2@986,1165.55 C62.2
  Top Layer w15: v2(927,1165.6) C62.2 v2(986.05,1255) v2@988,1255 ; v2@935,1069 v2(935,1069.5) C61.2 ; L8.2 C61.2 ; C62.2@986,1165.55 C61.2
VDD_ERX: C20.2 C26.2 C27.2 L3.2 U3.20 | length 668
  Top Layer w4: C20.2 2460,2202.86 ccw(c2490.25,2202.86) 2468.86,2181.46 cw(c2446.8,2159.4) 2478,2159.4 U3.20
  Top Layer w6: v1(2427,2309) C20.2
  Top Layer w15: v2@2737,1164 v2(2738.6,1165.6) C27.2 v2(2795.95,1252.05) v2@2795,1253 ; v2(2749.5,1069.5) C26.2 ; L3.2 C26.2 ; C27.2@2796,1165.55 C26.2
VDD_I2C: C22.2 C54.2 C55.2 L7.2 R4.2 R5.2 R6.2 R7.2 U1.2 U3.30 | length 682.1
  Top Layer w4: C22.2 2372,2027 C22.2@2371,2028 ; C22.2@2376,2026 U3.30
  Top Layer w6: R4.2 R5.2 1670.6,2234 1671.6,2235 v1(1716,2235) ; v1(1670,1829.9) R7.2 ; R6.2 1770.2,1830.1 v1(1810,1830.1) ; C22.2@2371,2028 v1(2371,2064)
  Top Layer w10: U1.2@1505.04,2359 1561,2359 v1(1577,2343)
  Top Layer w15: v2(567,1166) 623.45,1166 C55.2 v2(623.85,1251) ; v2(577,1068) 622.4,1068 C54.2 ; L7.2 C54.2 ; C55.2@623.9,1165.55 C54.2
VDD_IO: C21.2 C49.2 C50.2 L6.2 U3.25 | length 735.8
  Top Layer w4: C21.2 2302,2295.87 2448.66,2149.22 cw(c2416.44,2117) 2462,2117 U3.25
  Top Layer w6: v1(2265,2309) C21.2
  Top Layer w15: v2@3461,1166 v2(3461.45,1165.55) 3520,1165.55 C49.2 ; v2@3470,1069 v2(3470.5,1069.5) C49.2 ; L6.2 C49.2 ; C50.2 v2(3520.05,1253.05) v2@3521,1254
VDD_TDC_ANAL: C18.2 C65.2 C66.2 L9.2 U3.22 | length 698.6
  Top Layer w4: C18.2 2384,2284 ccw(c2456.43,2284) 2405.21,2232.79 2448.08,2189.92 cw(c2395.16,2137) 2469.7,2143.65 2469.7,2137.3 ; U3.22 2470,2137.3
  Top Layer w6: v1(2351,2309) C18.2
  Top Layer w15: v2@3099,1166 v2(3099.4,1165.6) C66.2 v2(3157.95,1255.05) v2@3157,1256 ; v2@3108,1069 v2(3108.5,1069.5) C65.2 ; L9.2 C65.2 ; C66.2@3158,1165.55 C65.2
VDD_TDC_DIG: C11.2 C12.2 C19.2 L2.2 U3.16 | length 498.5
  Top Layer w4: U3.16 2502,2078.44 cw(c2539.56,2078.44) 2512.97,2104.97 ; 2513.03,2105.03 cw(c2539.56,2078.44) 2539.56,2116 C19.2 v1(2556,2146)
  Top Layer w10: C11.2 C12.2@2434,1165.55
  Top Layer w15: v2(2375.4,1165.6) C12.2 v2(2433.95,1251.95) ; v2(2391.5,1069.5) C11.2 L2.2
VDD_TS: C16.2 C37.2 C38.2 L4.2 U3.7 | length 555.6
  Top Layer w4: U3.7 2523,1957 2518,1952 2518,1929 ccw(c2561.46,1929) 2530.73,1898.27 2532.03,1896.97 cw(c2491.06,1856) 2549,1856 C16.2
  Top Layer w6: v1(2549,1781) C16.2
  Top Layer w15: v2@1650,1166 v2(1650.4,1165.6) C38.2 v2(1710.05,1254.05) v2@1714,1258 ; v2(1660.5,1069.5) C37.2 ; L4.2 C37.2 ; C38.2@1710,1165.55 C37.2
VEXT: J1.1 R1.2 R2.2 R3.2 | length 277.1
  Top Layer w6: J1.1 1068.4,2184.6 1118.4,2234.6 R2.2 1150.4,2235 R1.2 R3.2
VREF_TS: C31.2 U3.5 U6.4 | length 2821.7
  Top Layer w4: C31.2 414.4,1281.98 cw(c514.4,1281.98) 443.69,1352.69 533.71,1442.71 cw(c604.42,1372) 604.42,1472 2273.58,1472 ccw(c2273.58,1572) 2344.29,1501.29 2472.71,1629.71 ccw(c2402,1700.42) 2502,1700.42 U3.5
  Top Layer w15: U6.4 C31.2
pads on no net: J1. J1.4 J1.5 U3.0@2435.12,1996.8 U3.0@2438.66,1996.8 U3.0@2442.4,1996.8 U3.0@2446.73,1996.8 U3.0@2451.06,1996.8 U3.0@2455.4,1996.8 U3.0@2459.14,1996.8 U3.0@2462.68,1996.8 U3.0@2466.2,1996.8 U3.0@2470.53,1996.8 U3.0@2473.76,1996.8 U3.0@2476.03,1962.57 U3.0@2478.19,1996.8 U3.0@2479.13,1962.57 U3.0@2481.37,1996.8 U3.0@2482.13,1962.57 U3.0@2485.71,1996.8 U3.0@2489.52,1996.8 U3.0@2492.94,1962.57 U3.0@2493.07,1996.8 U3.0@2496.89,1996.77 U3.0@2499.92,1962.57 U3.0@2501.22,1996.8 U3.0@2506.17,1965.18 U3.0@2506.17,1969.11 U3.0@2506.17,1972.11 U3.0@2506.17,1976.05 U3.0@2506.17,1979.89 U3.0@2506.17,1982.89 U3.0@2506.17,1986.07 U3.0@2506.17,1990.01 U6.1 U6.6

## Polygon pours and split planes (outlines as drawn)
GND on Bottom Layer "Signal-No Net" (solid, pour order 2): 0,0 4000,0 4000,1700 4000,3600 0,3600
no net on Bottom Layer "Signal-No Net" (solid, pour order 4): 0,0 4000,0 4000,3600 0,3600 0,0
GND on Top Layer "Signal-No Net" (solid, pour order 6): 0,0 4000,0 4000,3600 0,3600 0,0
GND on GND (split plane): 3979.9,20.1 20.1,20.1 20.1,3579.9 3979.9,3579.9
VDD_TDC_DIG on POWER (split plane): 2972.44,2116.87 2972.44,1533.13 2654.65,1215.35 2653.45,1213.78 2653.14,1213.03 2652.69,1211.96 2652.44,1210 2652.44,401.56 2298.56,401.56 2298.56,1227.87 2377.13,1306.44 2548,1306.44 2549.96,1306.69 2551.03,1307.14 2551.78,1307.45 2553.35,1308.65 2828.35,1583.65 2829.55,1585.22 2830.31,1587.04 2830.56,1589 2830.56,1993 2830.31,1994.96 2829.86,1996.03 2829.55,1996.78 2828.35,1998.35 2785.35,2041.35 2783.78,2042.55 2783.03,2042.86 2781.96,2043.31 2780,2043.56 2634,2043.56 2632.04,2043.31 2630.22,2042.55 2628.65,2041.35 2571.47,1984.16 2470.16,1984.16 2470.16,2180.23 2470.72,2180.65 2540.7,2250.64 2838.67,2250.64
VDD_DMRO on POWER (split plane): 2815.44,1989.87 2815.44,1592.13 2544.87,1321.56 2374,1321.56 2372.04,1321.31 2370.22,1320.55 2368.65,1319.35 2285.65,1236.35 2284.45,1234.78 2284.14,1234.03 2283.69,1232.96 2283.44,1231 2283.44,401.56 1936.56,401.56 1936.56,1305.87 2061.13,1430.44 2477,1430.44 2478.96,1430.69 2480.03,1431.14 2480.78,1431.45 2482.35,1432.65 2667.35,1617.65 2668.55,1619.22 2669.31,1621.04 2669.56,1623 2669.56,1847 2669.31,1848.96 2668.55,1850.78 2667.35,1852.35 2631.35,1888.35 2629.78,1889.55 2629.03,1889.86 2627.96,1890.31 2626,1890.56 2470.16,1890.56 2470.16,1969.04 2574.6,1969.04 2576.56,1969.29 2577.63,1969.74 2578.38,1970.05 2579.95,1971.25 2637.13,2028.44 2776.87,2028.44
VDD_TS on POWER (split plane): 2654.44,1843.87 2654.44,1626.13 2473.87,1445.56 2058,1445.56 2056.04,1445.31 2054.22,1444.55 2052.65,1443.35 1923.65,1314.35 1922.45,1312.78 1922.14,1312.03 1921.69,1310.96 1921.44,1309 1921.44,401.56 1575.96,401.56 1575.96,1330.47 1795.93,1550.44 2382.9,1550.44 2384.86,1550.69 2385.93,1551.14 2386.68,1551.45 2388.25,1552.65 2467.95,1632.35 2469.15,1633.92 2469.91,1635.74 2470.16,1637.7 2470.16,1802.6 2470.16,1875.44 2622.87,1875.44
VDD_TDC_ANAL on POWER (split plane): 3383.44,2405.87 3383.44,401.56 3029.56,401.56 3029.56,1311.87 3141.35,1423.65 3142.55,1425.22 3143.31,1427.04 3143.56,1429 3143.56,2354 3143.31,2355.96 3142.86,2357.03 3142.55,2357.78 3141.35,2359.35 2995.35,2505.35 2993.78,2506.55 2993.03,2506.86 2991.96,2507.31 2990,2507.56 2499,2507.56 2497.04,2507.31 2495.22,2506.55 2493.65,2505.35 2385.65,2397.35 2384.45,2395.78 2384.14,2395.03 2383.69,2393.96 2383.44,2392 2383.44,2193.56 2311.56,2193.56 2311.56,2575.87 2415.13,2679.44 3109.87,2679.44
VDD_ERX on POWER (split plane): 3128.44,2350.87 3128.44,1432.13 3016.65,1320.35 3015.45,1318.78 3015.14,1318.03 3014.69,1316.96 3014.44,1315 3014.44,401.56 2667.56,401.56 2667.56,1206.87 2985.35,1524.65 2986.55,1526.22 2987.31,1528.04 2987.56,1530 2987.56,2120 2987.31,2121.96 2986.55,2123.78 2985.35,2125.35 2847.15,2263.55 2845.58,2264.75 2844.83,2265.06 2843.76,2265.51 2841.8,2265.76 2537.57,2265.76 2535.61,2265.51 2533.79,2264.75 2532.22,2263.55 2462.24,2193.56 2398.56,2193.56 2398.56,2388.87 2502.13,2492.44 2986.87,2492.44
VDD_IO on POWER (split plane): 3979.9,401.56 3398.56,401.56 3398.56,2409 3398.31,2410.96 3397.86,2412.03 3397.55,2412.78 3396.35,2414.35 3118.35,2692.35 3116.78,2693.55 3116.03,2693.86 3114.96,2694.31 3113,2694.56 2412,2694.56 2410.04,2694.31 2408.22,2693.55 2406.65,2692.35 2298.65,2584.35 2297.45,2582.78 2297.14,2582.03 2296.69,2580.96 2296.44,2579 2296.44,2193.56 2089.13,2193.56 2087.35,2195.35 1452.35,2830.35 1450.78,2831.55 1450.03,2831.86 1448.96,2832.31 1447,2832.56 20.1,2832.56 20.1,3579.9 3979.9,3579.9
VDD2V5 on POWER (split plane): 2455.04,1640.83 2379.77,1565.56 1792.8,1565.56 1790.84,1565.31 1789.02,1564.55 1787.45,1563.35 1563.05,1338.95 1561.85,1337.38 1561.54,1336.63 1561.09,1335.56 1560.84,1333.6 1560.84,401.56 1207.56,401.56 1207.56,1478.87 1399.13,1670.44 2179,1670.44 2180.96,1670.69 2182.03,1671.14 2182.78,1671.45 2184.35,1672.65 2242.13,1730.44 2455.04,1730.44
VDD_EFUSE on POWER (split plane): 2455.04,1802.6 2455.04,1745.56 2239,1745.56 2237.27,1745.34 2237.04,1745.31 2235.22,1744.55 2233.65,1743.35 2175.87,1685.56 1396,1685.56 1394.04,1685.31 1392.22,1684.55 1390.65,1683.35 1194.65,1487.35 1193.45,1485.78 1193.14,1485.03 1192.69,1483.96 1192.44,1482 1192.44,401.56 844.56,401.56 844.56,1653.87 985.13,1794.44 1902,1794.44 1903.96,1794.69 1905.03,1795.14 1905.78,1795.45 1907.35,1796.65 2039.13,1928.44 2455.04,1928.44
VDD_5V on POWER (split plane): 3979.9,20.1 20.1,20.1 20.1,386.44 3979.9,386.44
VDD_I2C on POWER (split plane): 2076.65,2184.65 2080.65,2180.65 2082.22,2179.45 2084.04,2178.69 2086,2178.44 2455.04,2178.44 2455.04,1976.6 2455.04,1943.56 2036,1943.56 2034.27,1943.34 2034.04,1943.31 2032.22,1942.55 2030.65,1941.35 1898.87,1809.56 982,1809.56 980.04,1809.31 978.97,1808.86 978.22,1808.55 976.65,1807.35 831.65,1662.35 830.45,1660.78 830.14,1660.03 829.69,1658.96 829.44,1657 829.44,401.56 20.1,401.56 20.1,2817.44 1443.87,2817.44

## Keep-outs
Keep-Out Layer:
  the board outline again, w10
  text "Keep-Out Layer" at 4145,1147 h50

## Other copper
Top Layer:
  rectangle net VDD_5V: 16,278 320,390
  rectangle net VDD_5V: 300,40 525,390
  rectangle net VDD_5V: 510,40 650,240
  rectangle net VDD_5V: 870,40 1010,240
  rectangle net VDD_5V: 1231.6,41.1 1371.6,241.1
  rectangle net VDD_5V: 1591.6,42.1 1731.6,242.1
  rectangle net VDD_5V: 1961.6,42.1 2101.6,242.1
  rectangle net VDD_5V: 2321.6,42.1 2461.6,242.1
  rectangle net VDD_5V: 2681.6,42.1 2821.6,242.1
  rectangle net VDD_5V: 3041.6,42.1 3181.6,242.1
  rectangle net VDD_5V: 3401.6,42.1 3541.6,242.1
  text "ET2 Test Board" at 321,3464 h60
  text "2021/11/24" at 316,3376 h60
  text "Designed By: Wei Zhang" at 316,3297 h60
  text "Top Layer" at 4145,2563 h50
Bottom Layer:
  text "Bottom Layer" at 4145,2139 h50
GND (plane layer: these items are gaps in the copper):
  text "GND Layer" at 4145,2422 h50
POWER (plane layer: these items are gaps in the copper):
  lines w15: -4,2825 1447,2825 2082,2190 2086,2186 2465.37,2186 2537.57,2258.2 2841.8,2258.2 2980,2120 2980,1530 2660,1210 2660,394 ; 3,394 4000,394 ; 837,394 837,1657 982,1802 1902,1802 2036,1936 2462.6,1936 2462.6,2186 ; 1200,394 1200,1482 1396,1678 2179,1678 2239,1738 2462.6,1738 ; 1568.4,394 1568.4,1333.6 1792.8,1558 2382.9,1558 2462.6,1637.7 2462.6,1802.6 2462.6,1976.6 2574.6,1976.6 2634,2036 2780,2036 2823,1993 2823,1589 2548,1314 2374,1314 2291,1231 2291,394 ; 1929,394 1929,1309 2058,1438 2477,1438 2662,1623 2662,1847 2626,1883 2462.6,1883 ; 2304,2186 2304,2579 2412,2687 3113,2687 3391,2409 3391,394 ; 2391,2186 2391,2392 2499,2500 2990,2500 3136,2354 3136,1429 3022,1315 3022,394
  text "Power Layer" at 4145,2280 h50

## Silkscreen, mask and mechanical layers (free items; w line width, h text height)
Top Overlay:
  lines w10: 770,3010 730,3010 710,2990 710,2460 740,2430 910,2430 ; 800,2810 770,2840 770,3160 800,3190 ; 950,2150 910,2190 910,2680 950,2720
  text "Pulse" at 1337,3492 h50
  text "Clk1G28" at 2481,3492 h50
  text "N" at 1358,3237 h50 r180
  text "N" at 2557,3237 h50 r180
  text "P" at 1523,3187.02 h50
  text "P" at 2722,3187.02 h50
  text "Dataout" at 3729,3163 h50 r270
  text "GND" at 810,3140 h40
  text "P" at 3465,3100 h50 r90
  text "NA" at 810,3077 h40
  text "NA" at 810,3012 h40
  text "SCL" at 810,2947 h40
  text "N" at 3415,2935 h50 r270
  text "SDA" at 810,2884 h40
  text "Vext" at 810,2820 h40
  text "Testout_TS" at 3737.33,2359 h50 r270
  text "Top Overlay" at 4145,1997 h50
  text "Ext_Clk(8M)" at 88,1874 h50 r270
  text "Out_TS" at 3737.33,1649 h50 r270
  text "Vdd_I2C" at 567,1323 h35
  text "Vdd_eFuse" at 889,1323 h35
  text "Vdd2V5" at 1308,1323 h35
  text "Vdd_TS" at 1668,1323 h35
  text "Vdd_DMRO" at 1996,1323 h35
  text "Vdd_TDC_Dig" at 2305,1323 h35
  text "Vdd_eRx" at 2735,1323 h35
  text "Vdd_TDC_Anal" at 3014,1323 h35
  text "Vdd_IO" at 3700,1231 h35
Bottom Overlay:
  text "Bottom Overlay" at 4145,1855 h50
Top Paste:
  text "Top Paste" at 4145,1714 h50
Bottom Paste:
  text "Bottom Paste" at 4145,1555 h50
Top Solder:
  rectangle: 315.52,3457.57 693.52,3505.57
  text "Top Solder" at 4145,1430 h50
Bottom Solder:
  text "Bottom Solder" at 4145,1272 h50
Mechanical 1:
  text "Mechanical 1" at 4145,989 h50
Mechanical 5:
  text "Mechanical 5" at 4137,839 h50
Mechanical 13:
  text "Mechanical 13" at 4145,706 h50

## Text inside footprints (layer, text, board x,y; h text height)
J2: Top Overlay "3" at 1472,1882 h50 r270; Top Overlay "4" at 1572,1882 h50 r270; Top Overlay "2" at 1572,2142 h50 r270; Top Overlay "1" at 1472,2122 h50 r270